# Altium PCB 主控板.PcbDoc
Units mil, origin at the board's own origin, x right, y up, seen from the top; angles counter-clockwise.
Board outline 3015 x 3325 mil, 2 copper layers (Top Layer, Bottom Layer); 40 components, 37 nets, 216 pads, 0 vias.
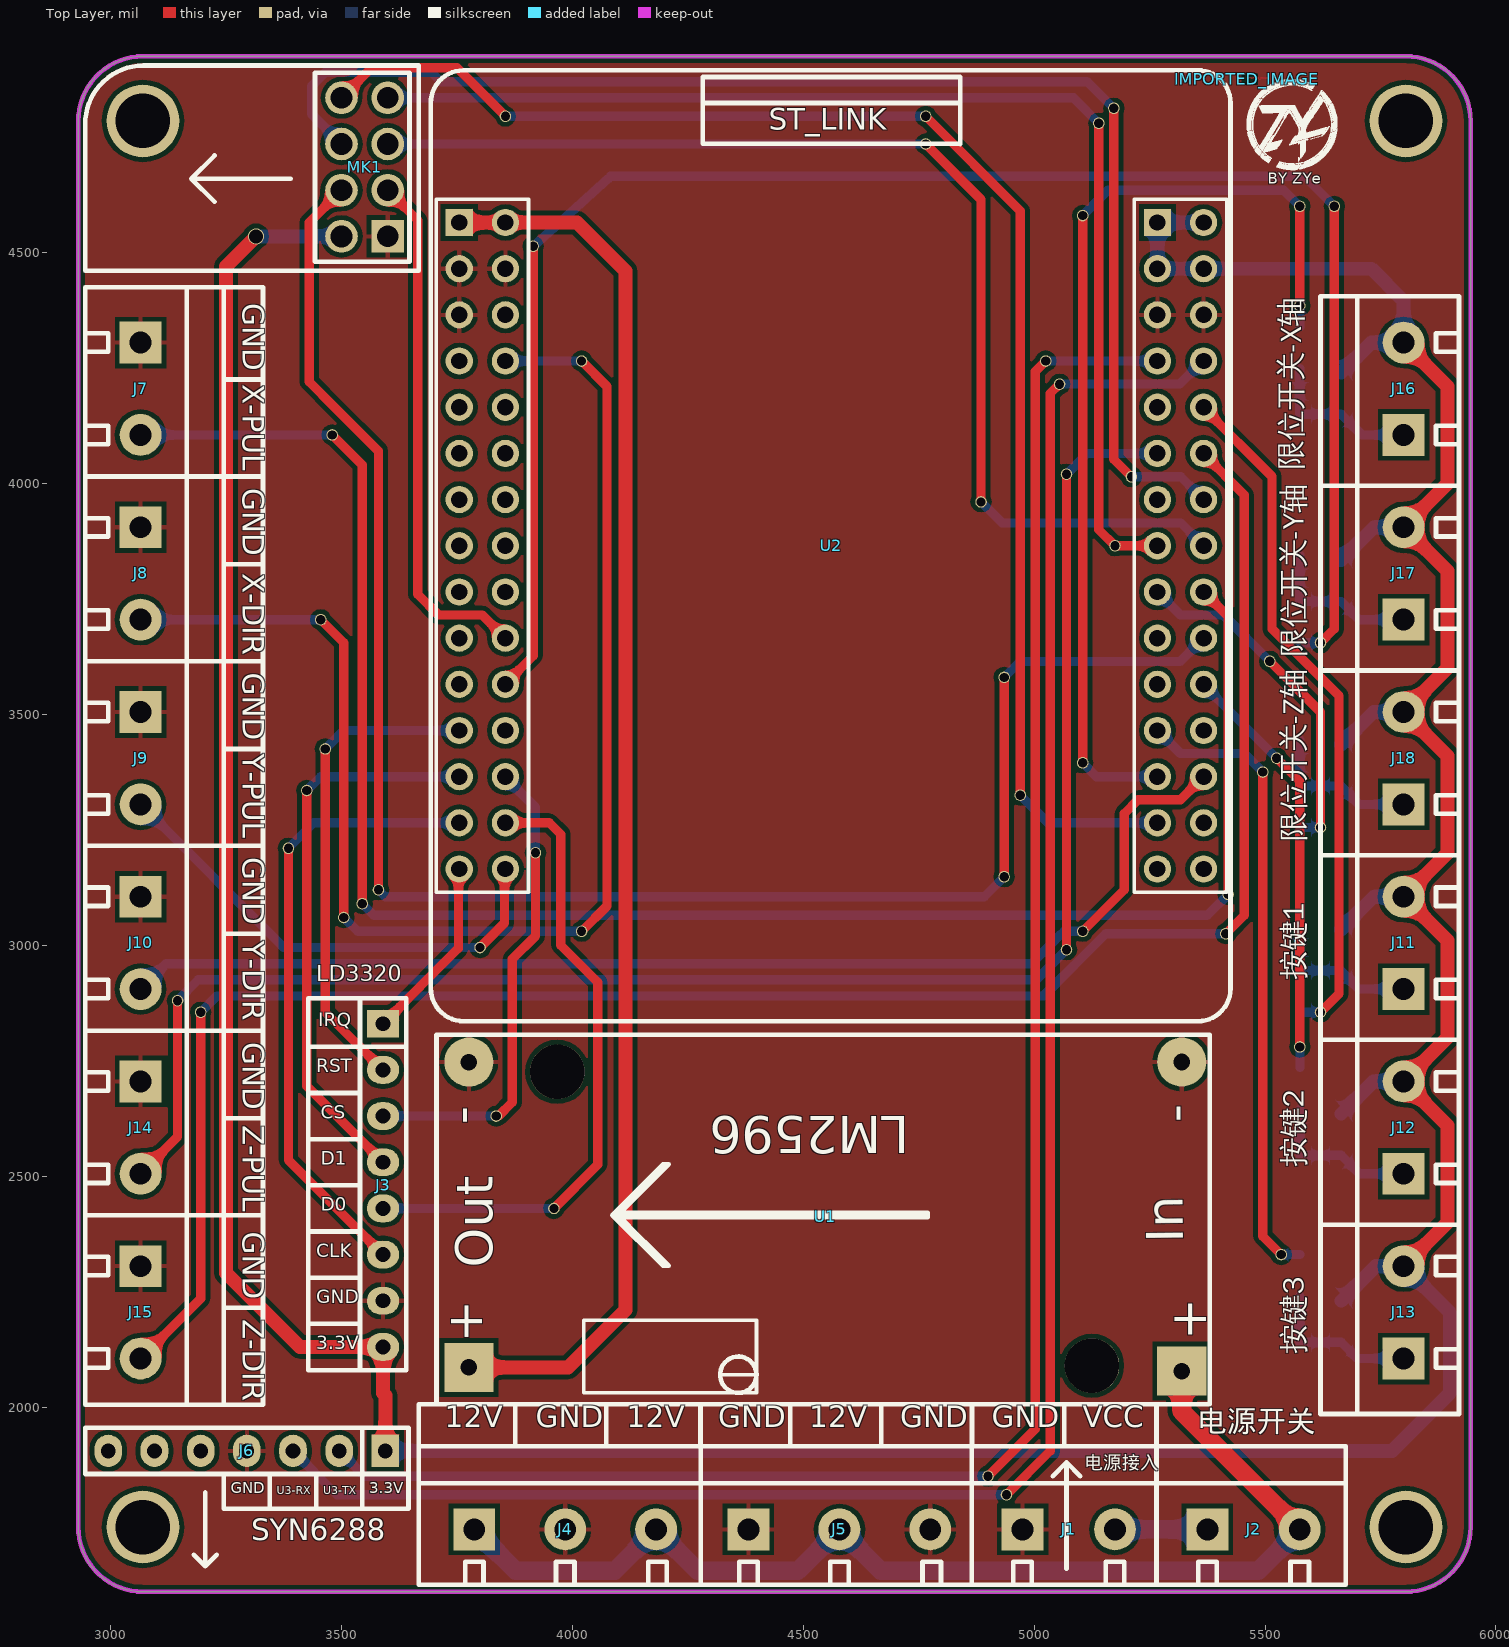
[diagram p0: Top Layer view]
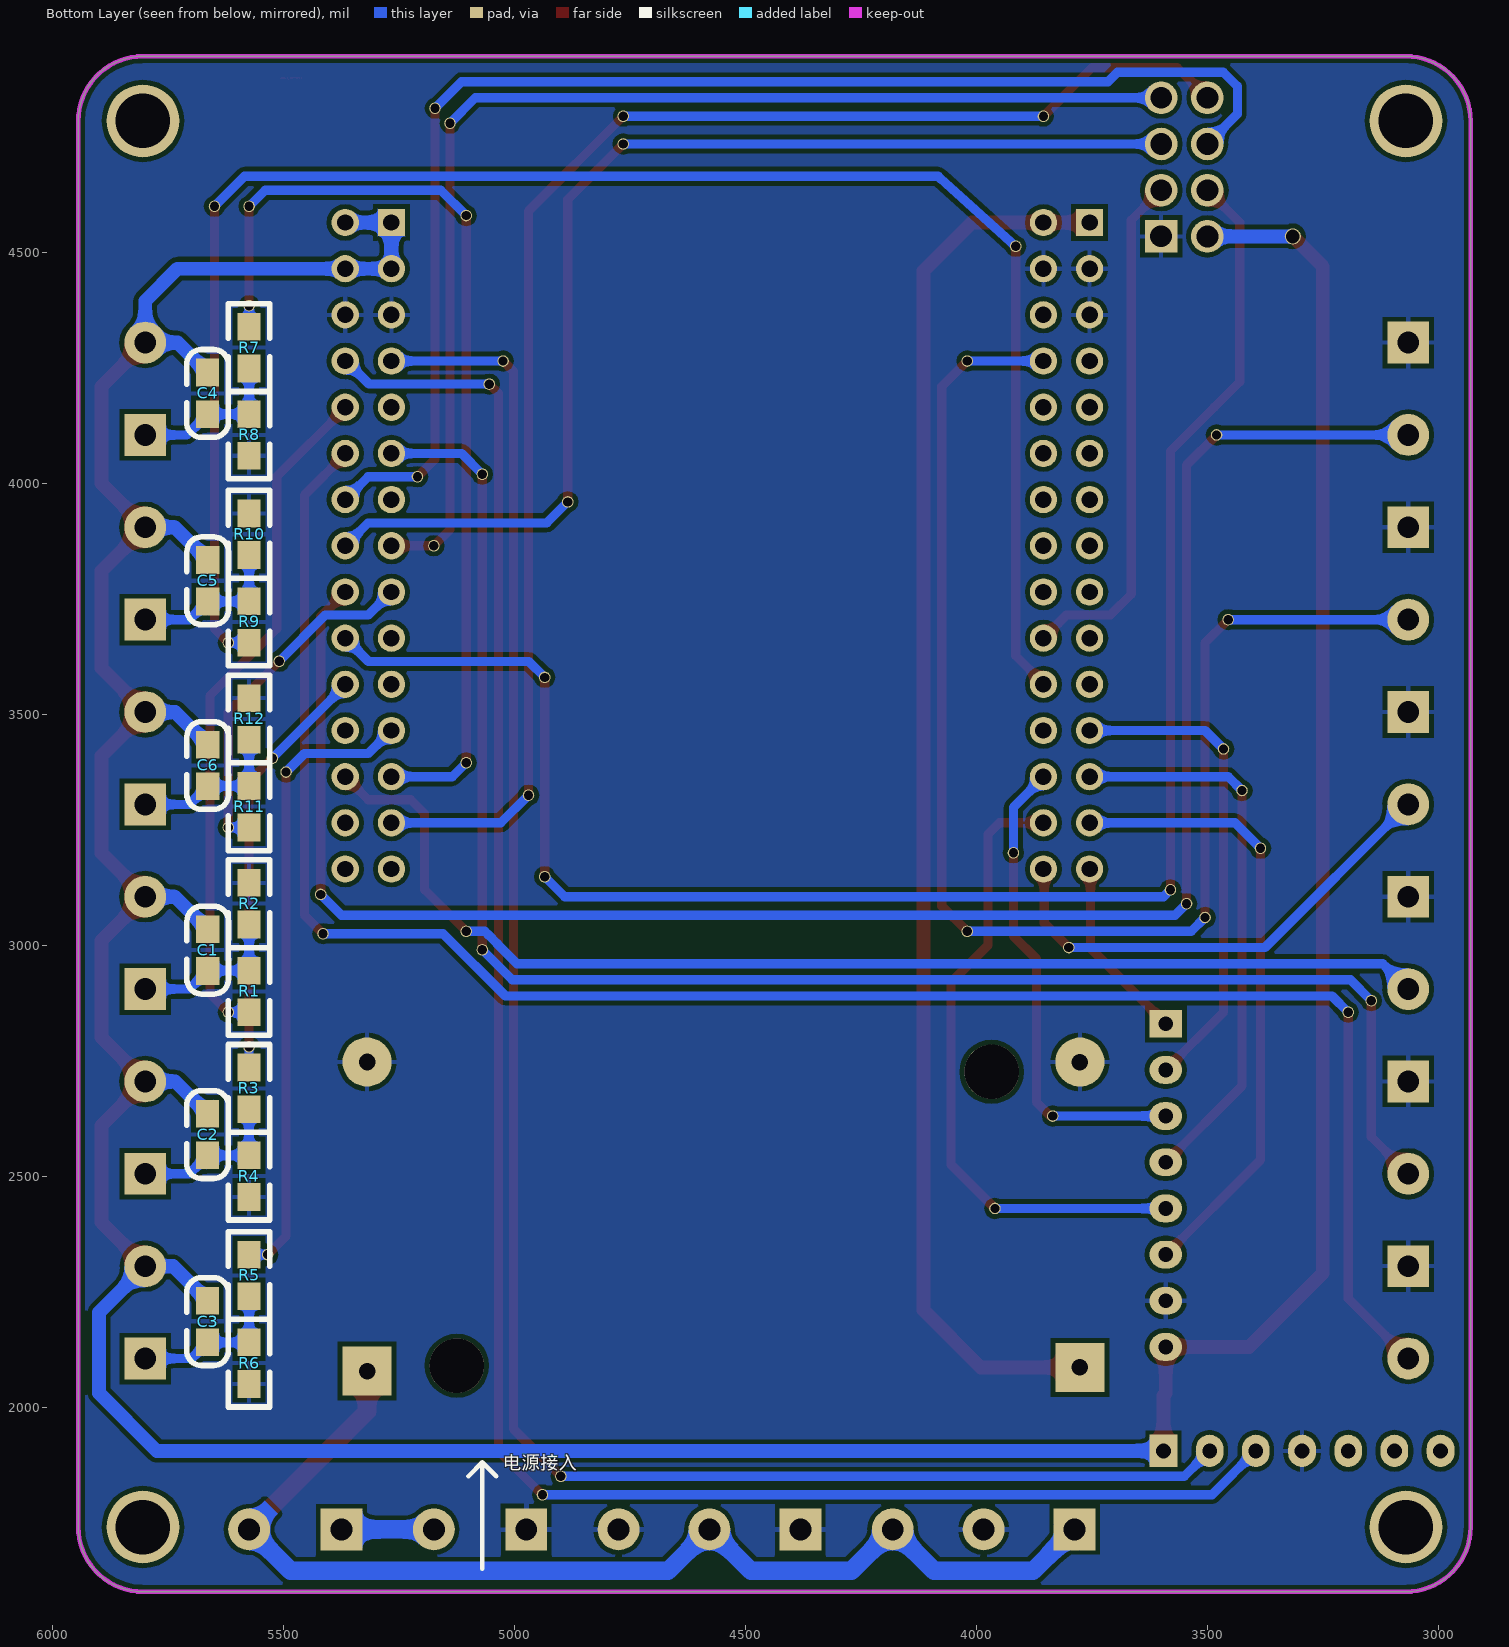
[diagram p1: Bottom Layer view, seen from below]

## Layer stack, top to bottom
Top Solder: solder mask 0.4, Solder Resist, Dk 3.5
Top Layer: signal copper 1.4
Dielectric 1: dielectric 12.6, FR-4, Dk 4.8
Bottom Layer: signal copper 1.4
Bottom Solder: solder mask 0.4, Solder Resist, Dk 3.5

## Board outline
2930,1740 2930,4785 cw(c3070,4785) 3070,4925 5805,4925 cw(c5805,4785) 5945,4785 5945,1740 cw(c5805,1740) 5805,1600 3070,1600 cw(c3070,1740)

## Design rules (kind name [scope] priority, off if disabled: settings)
Clearance [All] p1: gap=10 ignorepadtopadclearanceinfootprint=FALSE except(0: Arc-Hole Track-Hole SMDPad-Hole THPad-Hole Via-Hole Fill-Hole Poly-Hole Region-Hole Text-Hole)
PolygonConnect [All] p1: connectstyle=Relief reliefconductorwidth=10 reliefentries=4 polygonreliefangle="90 Angle" airgapwidth=10
RoutingVias [All] p1: holewidth=28 width=50 viastyle="Through Hole" minholewidth=28 minwidth=50 maxholewidth=150 maxwidth=200
SilkToSilkClearance [All] p1: silktosilkclearance=5
SilkToSolderMaskClearance [IsPad] p1: minsilkscreentomaskgap=0 clearancetoexposedcopper=TRUE
SolderMaskExpansion [All] p1: expansion=4
Width 12V [InNet('+12')] p1: maxlimit=100 minlimit=40 preferedwidth=40
Width 5V [InNet('+5')] p2: maxlimit=100 minlimit=30 preferedwidth=30
Width 3,3V [InNet('3.3V')] p3: maxlimit=100 minlimit=30 preferedwidth=30
Width GND [InNet('GND')] p4: maxlimit=100 minlimit=30 preferedwidth=30
Width [All] p5: maxlimit=100 minlimit=20 preferedwidth=20
28 further rules are at their usual default settings.

## Classes and differential pairs
component class 主控板: C1 C2 C3 C4 C5 C6 J1 J2 J3 J4 J5 J6 J7 J8 J9 J10 J11 J12 J13 J14 J15 J16 J17 J18 MK1 R1 R2 R4 R6 R7 R8 R9 R10 R11 R12 U1

## Components (designator, comment, footprint, x,y, rotation, side; value= is the part's Value field where it differs from the comment)
C1 "104" 0805C 5665,2945 r90 bottom
C2 "104" 0805C 5665.4,2545.71 r90 bottom
C3 "104" 0805C 5665.4,2140.71 r90 bottom
C4 "104" 0805C 5665.4,4150.71 r90 bottom
C5 "104" 0805C 5665,3745 r90 bottom
C6 "104" 0805C 5665,3345 r90 bottom
IMPORTED_IMAGE "Comment" IMPORTED_IMAGE 5460,4875 r0 top
J1 "12V电源" KF301-5.0-2P 4975,1735 r0 top
J2 "SWITCH" KF301-5.0-2P 5375,1735 r0 top
J3 "LD3320" Fe-HDR1X8/2.54-S 3590,2830 r0 top
J4 "KF301-3P" KF301-5.0-3P 3787.6,1735 r0 top
J5 "KF301-3P" KF301-5.0-3P 4381.3,1735 r0 top
J6 "SYN6288" Fe-HDR1X7/2.54-S 3595,1905 r270 top
J7 "KF301-2P" KF301-5.0-2P 3065,4305 r270 top
J8 "KF301-2P" KF301-5.0-2P 3065,3905 r270 top
J9 "KF301-2P" KF301-5.0-2P 3065,3505 r270 top
J10 "KF301-2P" KF301-5.0-2P 3065,3105 r270 top
J11 "按键1" KF301-5.0-2P 5800,2905 r90 top
J12 "按键2" KF301-5.0-2P 5800,2505 r90 top
J13 "按键3" KF301-5.0-2P 5800,2105 r90 top
J14 "KF301-2P" KF301-5.0-2P 3065,2705 r270 top
J15 "KF301-2P" KF301-5.0-2P 3065,2305 r270 top
J16 "限位开关_X轴" KF301-5.0-2P 5800,4105 r90 top
J17 "限位开关_Y轴" KF301-5.0-2P 5800,3705 r90 top
J18 "限位开关_Z轴" KF301-5.0-2P 5800,3305 r90 top
MK1 "NRF24L01" WIRELM-SMD_NRF24L01 3096.2,4755.8 r270 top
R1 "1K" 0805R 5575,2855 r90 bottom
R2 "4.7K" 0805R 5575,3135 r270 bottom
R3 "1K" 0805R 5575.4,2735 r270 bottom
R4 "4.7K" 0805R 5575.4,2455 r90 bottom
R5 "1K" 0805R 5575,2330 r270 bottom
R6 "4.7K" 0805R 5575,2050 r90 bottom
R7 "1K" 0805R 5575,4339 r270 bottom
R8 "4.7K" 0805R 5575,4060 r90 bottom
R9 "1K" 0805R 5575,3655 r90 bottom
R10 "4.7K" 0805R 5575,3935 r270 bottom
R11 "1K" 0805R 5575,3255 r90 bottom
R12 "4.7K" 0805R 5575,3535 r270 bottom
U1 "LM2596模块-29AH" LM2596 4552.3,2406.06 r180 top
U2 "STM32F103RCT6核心板" STM32F103RC 3755,3165 r0 top

## Footprints (in the part's own frame and the unit in brackets; to place one, negate y for a bottom-side part, rotate by r counter-clockwise, add the part's x,y. Pads: shape width x height; smd on the part's side, far side on the other; paste and mask are expansions set on the pad)
0805C [mil]
  rect 60x50 smd: 1(-0.71,-0.4) 2(89.29,-0.4)
  silkscreen extent -51,-45 139,45, body extent 6,-25 84,25, height 31
0805R [mil]
  rect 60x50 smd: 1(0,0) 2(90,0)
  silkscreen extent -50,-45 140,45, body extent 1,-25 80,25, height 15
Fe-HDR1X7/2.54-S [mil]
  rect 70x60 hole 32: 1(0,0)
  oval 70x60 hole 32: 2(0,-100) 3(0,-200) 4(0,-300) 5(0,-400) 6(0,-500) 7(0,-600)
  silkscreen extent -50,-650 50,50, body extent -49,-655 49,55, height 126
Fe-HDR1X8/2.54-S [mil]
  rect 70x60 hole 32: 1(0,0)
  oval 70x60 hole 32: 2(0,-100) 3(0,-200) 4(0,-300) 5(0,-400) 6(0,-500) 7(0,-600) 8(0,-700)
  silkscreen extent -50,-750 50,55, body extent -49,-755 49,55, height 126
IMPORTED_IMAGE [mil]
  silkscreen extent 0,-196 197,0
KF301-5.0-2P [mm] "可拼接端子/6A"
  rect 2.3x2.3 hole 1.2: 1(0,0)
  round 2.3 hole 1.2: 2(5.08,0)
  silkscreen extent -3.05,-3.05 7.62,4.57, body extent -3,-3.09 7.5,4.51, height 10.05
KF301-5.0-3P [mm] "可拼接端子/6A"
  rect 2.3x2.3 hole 1.2: 1(0,0)
  round 2.3 hole 1.2: 2(5,0) 3(10,0)
  silkscreen extent -3.05,-3.05 12.7,4.57, body extent -3,-3.09 12.5,4.51, height 10.05
LM2596 [mm]
  rect 2.7x2.7 hole 0.91: 1(-19.487,8.338) 3(19.719,8.137)
  round 2.7 hole 0.91: 2(-19.489,-8.663) 4(19.721,-8.66)
  round 3 hole 3 unplated: ""(-14.549,8.043) ""(14.862,-8.119)
  silkscreen extent -21.03,-10.16 21.51,10.16
STM32F103RC [mm]
  rect 1.5x1.5 hole 0.9: 1(0,35.56) 31(38.401,35.56)
  round 1.5 hole 0.9: 2(2.54,35.56) 3(0,33.02) 4(2.54,33.02) 5(0,30.48) 6(2.54,30.48) 7(0,27.94) 8(2.54,27.94) 9(0,25.4) 10(2.54,25.4) 11(0,22.86) 12(2.54,22.86) 13(0,20.32) 14(2.54,20.32) 15(0,17.78) 16(2.54,17.78) 17(0,15.24) 18(2.54,15.24) 19(0,12.7) 20(2.54,12.7) 21(0,10.16) 22(2.54,10.16) 23(0,7.62) 24(2.54,7.62) 25(0,5.08) 26(2.54,5.08) 27(0,2.54) 28(2.54,2.54) 29(0,0) 30(2.54,0) 32(40.941,35.56) 33(38.401,33.02) 34(40.941,33.02) 35(38.401,30.48) 36(40.941,30.48) 37(38.401,27.94) 38(40.941,27.94) 39(38.401,25.4) 40(40.941,25.4) 41(38.401,22.86) 42(40.941,22.86) 43(38.401,20.32) 44(40.941,20.32) 45(38.401,17.78) 46(40.941,17.78) 47(38.401,15.24) 48(40.941,15.24) 49(38.401,12.7) 50(40.941,12.7) 51(38.401,10.16) 52(40.941,10.16) 53(38.401,7.62) 54(40.941,7.62) 55(38.401,5.08) 56(40.941,5.08) 57(38.401,2.54) 58(40.941,2.54) 59(38.401,0) 60(40.941,0)
  silkscreen extent -1.27,-1.27 42.21,43.56
WIRELM-SMD_NRF24L01 [mm]
  rect 1.8x1.8 hole 1.2: 1(5.606,12.799)
  round 1.8 hole 1.2: 2(5.608,10.256) 3(3.068,12.796) 4(3.068,10.256) 5(0.528,12.796) 6(0.528,10.256) 7(-2.012,12.796) 8(-2.012,10.256)
  silkscreen extent -3.79,-3.84 7.5,14.5

## Part data
C1 C2 C3 C4 C5 C6: library part CAP, "无极性电容"
J1 J2 J11 J12 J13 J16 J17 J18: library part KF301-2P
J3: library part "Female HDR1X8"
J6: library part "Female HDR1X7"
R1 R2 R3 R4 R5 R6 R7 R8 R9 R10 R11 R12: library part RES

## Free pads (board coordinates)
  round 157.48 hole 118.11: 4(3070,4785) 4(3070,1740) 4(5805,4785) 4(5805,1740)
  round 25 hole 20: 5(3145,2880) 5(3195,2855) 5(3385,3210) 5(3425,3335) 5(3455,3705) 5(3465,3425) 5(3480,4105) 5(3500,4735) 5(3500,4835) 5(3505,3060) 5(3545,3090) 5(3580,3120) 5(3800,2995) 5(3835,2630) 5(3855,4795) 5(3915,4513.5) 5(3920,3200) 5(3960,2430) 5(4020,3030) 5(4020,4265) 5(4765,4735) 5(4765,4795) 5(4885,3960) 5(4900,1850) 5(4935,3148.33) 5(4935,3580) 5(4940,1810) 5(4970,3325) 5(5025,4265) 5(5055,4215) 5(5070,2990) 5(5070,4020) 5(5105,3030) 5(5105,3395) 5(5105,4580) 5(5140,4780) 5(5172.5,4812.5) 5(5175,3865) 5(5210.47,4014.53) 5(5415,3025) 5(5420,3110) 5(5495,3375) 5(5510,3615) 5(5525,3405) 5(5535,2330) 5(5575,4385) 5(5575,4600) 5(5575.2,2779.8) 5(5620,2855) 5(5620,3255) 5(5620,3655) 5(5650,4600)
  round 35 hole 30: 5(3315,4535)

## Nets (pads, with @x,y where several pads share a name; then routed paths per layer and width w, separated by ;. In a path a pad name is that pad's centre, name@x,y a point inside that pad or via, vN(x,y) a via of type N, cw(c..) or ccw(c..) an arc to the next point about the centre after c; other vN are vias at no path point)
3.3V: C1.2 C2.2 C3.2 C4.2 C5.2 C6.2 J3.8 J6.1 J11.2 J12.2 J13.2 J16.2 J17.2 J18.2 MK1.2 pad.5@3315,4535 U2.31 U2.32 U2.33 U2.34 | length 9995.1
  Top Layer w30: pad.5@3315,4535 3250,4470 3250,2290 3410,2130 J3.8 3590,2030 3595,2025 J6.1 ; J13.2 5895,2400 5895,2610 J12.2 5895,2800 5895,3010 J11.2 5895,3200 5895,3410 J18.2 5895,3600 5895,3810 J17.2 5895,4000 5895,4210 J16.2
  Bottom Layer w30: pad.5@3315,4535 MK1.2 ; J6.1 5775,1905 5900,2030 5900,2205 J13.2 5740,2305 C3.2 ; U2.32 U2.31 U2.33 U2.34 5730,4465 5800,4395 J16.2 5730,4305 C4.2 ; C1.2 5735.3,3105 J11.2 ; C6.2 5735.3,3505 J18.2 ; C5.2 5735.3,3905 J17.2 ; C2.2 5735,2705 J12.2
+5: U1.3 U2.1 U2.2 | length 3044
  Top Layer w30: U2.1 U2.2 4010,4565 4115,4460 4115,2210 3990.7,2085.7 U1.3
+12: J2.2 J4.1 J4.3 J5.2 U1.1 | length 2459.7
  Top Layer w40: U1.1 5319.49,1990.51 J2.2
  Bottom Layer w40: J4.1 3877.6,1645 4091.3,1645 J4.3 4271.3,1645 4488.15,1645 J5.2 4668.15,1645 5485,1645 J2.2
GND: J1.1 J3.7 J4.2 J5.1 J5.3 J6.4 J7.1 J8.1 J9.1 J10.1 J14.1 J15.1 MK1.1 R2.1 R4.1 R6.1 R8.1 R10.1 R12.1 U1.2 U1.4 U2.3 U2.4 U2.5 U2.35 U2.36
Key1: pad.5@5620,2855 R1.1 U2.40 | length 1493.8
  Top Layer w20: U2.40@5365,4165 5515,4015 5515,3685 5660,3540 5660,2895 pad.5@5620,2855
  Bottom Layer w20: R1.1 pad.5@5620,2855
Key2: pad.5@5525,3405 pad.5@5575.2,2779.8 R3.1 U2.52 | length 917.1
  Top Layer w20: pad.5@5525,3405 5575.2,3354.8 pad.5@5575.2,2779.8
  Bottom Layer w20: U2.52@5365,3565 pad.5@5525,3405 ; pad.5@5575.2,2779.8 5575.4,2774.6 R3.1
Key3: pad.5@5495,3375 pad.5@5535,2330 R5.1 U2.53 | length 1367
  Top Layer w20: pad.5@5495,3375 5495,2370 pad.5@5535,2330
  Bottom Layer w20: U2.53 5316.87,3415 5455,3415 pad.5@5495,3375 ; pad.5@5535,2330 R5.1
LD3320_CLK: J3.6 pad.5@3385,3210 U2.27 | length 1357.7
  Top Layer w20: pad.5@3385,3210 3385,3145 3385,2535 J3.6
  Bottom Layer w20: pad.5@3385,3210 3440,3265 U2.27
LD3320_CS: J3.3 pad.5@3835,2630 pad.5@3920,3200 U2.26 | length 1045.8
  Top Layer w20: pad.5@3835,2630 3840,2630 3870,2660 3870,2970 3920,3020 pad.5@3920,3200
  Bottom Layer w20: J3.3 pad.5@3835,2630 ; U2.26@3853.13,3365 3920,3298.13 pad.5@3920,3200
LD3320_D0: J3.5 pad.5@3960,2430 U2.28 | length 1384.7
  Top Layer w20: U2.28@3853.13,3265 U2.28 3950,3265 3975,3240 3975,3000 4055,2920 4055,2525 pad.5@3960,2430
  Bottom Layer w20: J3.5 pad.5@3960,2430
LD3320_D1: J3.4 pad.5@3425,3335 U2.25 | length 1215.8
  Top Layer w20: pad.5@3425,3335 3425,2695 J3.4
  Bottom Layer w20: pad.5@3425,3335 3455,3365 U2.25
LD3320_IRQ: J3.1 U2.29 | length 402.6
  Top Layer w20: J3.1 3753.13,2993.13 U2.29@3753.13,3165
LD3320_RST: J3.2 pad.5@3465,3425 U2.23 | length 1048.3
  Top Layer w20: pad.5@3465,3420 3465,2855 J3.2
  Bottom Layer w20: pad.5@3465,3425 3505,3465 U2.23
NetC1_1: C1.1 J11.1 R1.2 R2.2 | length 341.6
  Bottom Layer w20: R2.2 R1.2 5663.89,2945 C1.1 5703.89,2905 J11.1
NetC2_1: C2.1 J12.1 R3.2 R4.2 | length 341.2
  Bottom Layer w20: R3.2 R4.2 C2.1 5705,2505 J12.1
NetC3_1: C3.1 J13.1 R5.2 R6.2 | length 339.5
  Bottom Layer w20: R5.2 R6.2 C3.1 5700,2105 J13.1
NetC4_1: C4.1 J16.1 R7.2 R8.2 | length 342.6
  Bottom Layer w20: R7.2 R8.2 C4.1 5710,4105 J16.1
NetC5_1: C5.1 J17.1 R9.2 R10.2 | length 341.6
  Bottom Layer w20: R10.2 R9.2 5575.71,3744.29 C5.1 5703.89,3705 J17.1
NetC6_1: C6.1 J18.1 R11.2 R12.2 | length 341.6
  Bottom Layer w20: R12.2 R11.2 5663.89,3345 C6.1 5703.89,3305 J18.1
NetJ1_2: J1.2 J2.1 | length 200
  Bottom Layer w40: J1.2 J2.1
NRF_CE: MK1.3 U2.20 | length 1131.3
  Top Layer w20: MK1.3 3665,4570 3665,3760 3710,3715 3805,3715 U2.20
NRF_CSN: MK1.4 pad.5@3580,3120 pad.5@4935,3148.33 pad.5@4935,3580 U2.50 | length 3884
  Top Layer w20: MK1.4 3430,4565 3430,4220 3485,4165 3580,4070 pad.5@3580,3120 ; pad.5@4935,3148.33 pad.5@4935,3580
  Bottom Layer w20: pad.5@3580,3120 3595,3105 4891.67,3105 pad.5@4935,3148.33 ; pad.5@4935,3580 4969.53,3614.53 5316.39,3614.53 U2.50
NRF_IRQ: MK1.8 pad.5@3500,4835 pad.5@3855,4795 pad.5@4765,4795 pad.5@4970,3325 U2.57 | length 3212
  Top Layer w20: MK1.8 3565,4900 3750,4900 pad.5@3855,4795 ; pad.5@4765,4795 4970,4590 pad.5@4970,3325
  Bottom Layer w20: pad.5@3855,4795 pad.5@4765,4795 ; pad.5@4970,3325 5030,3265 U2.57
NRF_MISO: MK1.7 pad.5@5140,4780 pad.5@5175,3865 U2.45 | length 2582.3
  Top Layer w20: pad.5@5140,4780 5140,3900 5175,3865 U2.45@5265,3865
  Bottom Layer w20: MK1.7 5085,4835 pad.5@5140,4780
NRF_MOSI: MK1.6 pad.5@3500,4735 pad.5@5172.5,4812.5 pad.5@5210.47,4014.53 U2.44 | length 2924.9
  Top Layer w20: pad.5@5172.5,4812.5 5172.5,4052.5 pad.5@5210.47,4014.53
  Bottom Layer w20: MK1.6 3435,4800 3435,4860 3465.43,4890.43 3694.57,4890.43 3715,4870 5115,4870 pad.5@5172.5,4812.5 ; pad.5@5210.47,4014.53 5317.34,4014.53 U2.44
NRF_SCK: MK1.5 pad.5@4765,4735 pad.5@4885,3960 U2.46 | length 2510.9
  Top Layer w20: pad.5@4765,4735 4885,4615 pad.5@4885,3960
  Bottom Layer w20: MK1.5 pad.5@4765,4735 ; pad.5@4885,3960 4930.47,3914.53 5317.34,3914.53 U2.46
Switch1: pad.5@5105,3395 pad.5@5105,4580 pad.5@5575,4385 pad.5@5575,4600 R7.1 U2.55 | length 2127.6
  Top Layer w20: pad.5@5105,3395 pad.5@5105,4580 ; pad.5@5575,4385 pad.5@5575,4600
  Bottom Layer w20: pad.5@5105,3395 5135,3365 U2.55 ; pad.5@5105,4580 5160,4635 5540,4635 pad.5@5575,4600 ; R7.1 pad.5@5575,4385
Switch2: pad.5@3915,4513.5 pad.5@5620,3655 pad.5@5650,4600 R9.1 U2.22 | length 3796.8
  Top Layer w20: U2.22@3853.13,3565 3915,3626.87 pad.5@3915,4513.5 ; pad.5@5620,3655 5650,3685 pad.5@5650,4600
  Bottom Layer w20: pad.5@3915,4513.5 4077.78,4660 4082.78,4665 5585,4665 pad.5@5650,4600 ; R9.1 pad.5@5620,3655
Switch3: pad.5@5510,3615 pad.5@5620,3255 R11.1 U2.47 | length 756.8
  Top Layer w20: U2.47@5265,3765 U2.47@5265.94,3765 ; pad.5@5510,3615 5620,3505 pad.5@5620,3255
  Bottom Layer w20: U2.47 5316.87,3715 5410,3715 pad.5@5510,3615 ; R11.1 pad.5@5620,3255
SYN6288_RX: J6.3 pad.5@4940,1810 pad.5@5055,4215 U2.38 | length 4367.7
  Top Layer w20: pad.5@4940,1810 5035,1905 5035,4195 5055,4215 pad.5@5055.47,4215.47
  Bottom Layer w20: J6.3 3490,1810 pad.5@4940,1810 ; pad.5@5055.47,4215.47 5315.47,4215.47 U2.38@5365,4265
SYN6288_TX: J6.2 pad.5@4900,1850 pad.5@5025,4265 U2.37 | length 4136.4
  Top Layer w20: pad.5@4900,1850 5002.5,1952.5 5002.5,4219.22 5002.5,4242.5 pad.5@5025,4265
  Bottom Layer w20: J6.2 3550,1850 pad.5@4900,1850 ; pad.5@5025,4265 U2.37
X_DIR: J8.2 pad.5@3455,3705 pad.5@3505,3060 pad.5@4020,3030 pad.5@4020,4265 U2.8 | length 3030.6
  Top Layer w20: pad.5@3455,3705 3505,3655 pad.5@3505,3060 ; U2.8@3853.13,4265 U2.8 ; pad.5@4020,3030 4075,3085 4075,4210 pad.5@4020,4265
  Bottom Layer w20: J8.2 pad.5@3455,3705 ; pad.5@3505,3060 3535,3030 pad.5@4020,3030 ; U2.8 pad.5@4020,4265
X_PUL: J7.2 pad.5@3480,4105 pad.5@3545,3090 pad.5@5420,3110 U2.48 | length 4037.9
  Top Layer w20: pad.5@3480,4105 3545,4040 pad.5@3545,3090 ; U2.48 5420,3711.87 pad.5@5420,3110
  Bottom Layer w20: J7.2 pad.5@3480,4105 ; pad.5@3545,3090 3570,3065 5375,3065 pad.5@5420,3110
Y_DIR: J10.2 pad.5@5105,3030 U2.56 | length 2589.6
  Top Layer w20: pad.5@5105,3030 5195,3120 5195,3285 5225,3315 5316.87,3315 U2.56
  Bottom Layer w20: J10.2 3120,2960 4995,2960 5037.5,3002.5 5037.5,3003.46 5056.54,3022.5 5057.5,3022.5 5065,3030 pad.5@5105,3030
Y_PUL: J9.2 pad.5@3800,2995 U2.30 | length 1055.4
  Top Layer w20: pad.5@3800,2995 3853.13,3048.13 U2.30@3853.13,3165
  Bottom Layer w20: J9.2 3375,2995 pad.5@3800,2995
Z_DIR: J15.2 pad.5@3195,2855 pad.5@5415,3025 U2.42 | length 4187.3
  Top Layer w20: J15.2 3195,2235 pad.5@3195,2855 ; U2.42 5366.87,4063.13 5455,3975 5455,3065 pad.5@5415,3025
  Bottom Layer w20: pad.5@3195,2855 3230,2890 5020,2890 5155,3025 pad.5@5415,3025
Z_PUL: J14.2 pad.5@3145,2880 pad.5@5070,2990 pad.5@5070,4020 U2.41 | length 3622.3
  Top Layer w20: J14.2 3145,2585 pad.5@3145,2880 ; pad.5@5070,2990 pad.5@5070,4020
  Bottom Layer w20: pad.5@3145,2880 3190,2925 5005,2925 pad.5@5070,2990 ; pad.5@5070,4020 5115,4065 U2.41@5265,4065
pads on no net: J6.5 J6.6 J6.7 U1. U2.6 U2.7 U2.9 U2.10 U2.11 U2.12 U2.13 U2.14 U2.15 U2.16 U2.17 U2.18 U2.19 U2.21 U2.24 U2.39 U2.43 U2.49 U2.51 U2.54 U2.58 U2.59 U2.60

## Polygon pours and split planes (outlines as drawn)
GND on Bottom Layer "Bottom Layer-GND" (solid, remove dead copper, pour order 22): 2400,5430 2400,1605 2890,1115 2930,1155 6205,1155 6205,5415 6635,5845
GND on Top Layer "Top Layer-GND" (solid, remove dead copper, pour order 20): 2000,5505 2530,4975 2530,795 5900,795 6785,1680 6785,6200

## Keep-outs
Keep-Out Layer:
  the board outline again, w10

## Silkscreen, mask and mechanical layers (free items; w line width, h text height)
Top Overlay:
  lines w10: 2945,4777.18 cw(c3071.61,4778.39) 3070.4,4905 ; 3180,1680 3205,1655 ; 3205,1815 3205,1655 ; 3225,4610 3175,4660 ; 3225,4710 3175,4660 ; 3230,1680 3205,1655 ; 3245,1855 3245,1780 3345,1780 ; 3245,2005 3330,2005 3330,4425 3245,4425 ; 3245,2215 3325,2215 ; 3245,2415 3330,2415 ; 3245,2625 3325,2625 ; 3245,2815 3330,2815 ; 3245,3025 3325,3025 ; 3245,3215 3330,3215 ; 3245,3425 3325,3425 ; 3245,3615 3325,3615 ; 3245,3825 3325,3825 ; 3245,4015 3325,4015 ; 3245,4225 3325,4225 ; 3345,1855 3345,1780 ; 3390,4660 3175,4660 ; 3428.36,2180 3540,2180 ; 3428.36,2280 3540,2280 ; 3428.36,2380.01 3540,2380.01 ; 3428.36,2480.01 3540,2480.01 ; 3428.36,2580.01 3540,2580.01 ; 3428.36,2680.02 3540,2680.02 ; 3428.36,2780.02 3540,2780.02 ; 3445,1855 3445,1780 ; 3540,2080 3428.36,2080 3428.36,2885 3540,2885 ; 3545,1855 3545,1780 ; 3645,1855 3645,1780 3545,1780 ; 3667.6,1915 3667.6,2006.06 3724.48,2006.06 ; 3693.35,2907.08 3693.35,4823.87 cw(c3763.85,4824.08) 3763.64,4894.58 5354.5,4894.58 cw(c5354.5,4823.87) 5425.21,4823.87 5425.21,2906.13 cw(c5354.5,2906.13) 5354.5,2835.42 3765,2835.42 ; 3693.35,2907.29 ccw(c3765,2907.08) 3764.79,2835.42 ; 3876.57,1915 3876.57,2002.13 ; 4073.43,1915 4073.43,2002.13 ; 4277.32,1915 4277.32,2002.13 ; 4471.57,1915 4471.57,2002.13 ; 4668.43,1915 4668.43,2002.13 ; 4865.28,1915 4865.28,2002.13 ; 5040,1850 5070,1880 ; 5065,1915 5065,2002.13 ; 5070,1650 5070,1880 ; 5100,1850 5070,1880 ; 5265,1915 5265,2006.06 ; 3345,1780 3445,1780 ; 3445,1780 3545,1780
  text "BY ZYe" at 5506.06,4640 h40
  text "GND" at 3270,4390 h80 r270
  text "X-PUL" at 3270,4215 h80 r270
  text "限位开关-X轴" at 5595,4030 h80 r90
  text "GND" at 3270,3990 h80 r270
  text "X-DIR" at 3270,3805 h80 r270
  text "限位开关-Y轴" at 5600,3625 h80 r90
  text "GND" at 3270,3590 h80 r270
  text "Y-PUL" at 3270,3415 h80 r270
  text "限位开关-Z轴" at 5600,3225 h80 r90
  text "GND" at 3270,3190 h80 r270
  text "Y-DIR" at 3270,3010 h80 r270
  text "按键1" at 5600,2925 h80 r90
  text "LD3320" at 3445,2910 h60
  text "IRQ" at 3450,2815 h50
  text "GND" at 3270,2790 h80 r270
  text "RST" at 3445,2715 h50
  text "CS" at 3455,2615.02 h50
  text "Z-PUL" at 3270,2610 h80 r270
  text "按键2" at 5600,2520 h80 r90
  text "D1" at 3455,2515.01 h50
  text "D0" at 3455,2415.01 h50
  text "GND" at 3270,2380 h80 r270
  text "CLK" at 3445,2315 h50
  text "GND" at 3445,2215 h50
  text "Z-DIR" at 3270,2190 h80 r270
  text "3.3V" at 3445,2115 h50
  text "按键3" at 5600,2115 h80 r90
  text "12V" at 3723.33,1940 h80
  text "GND" at 3920.71,1940 h80
  text "12V" at 4118.09,1940 h80
  text "GND" at 4315.47,1940 h80
  text "12V" at 4512.86,1940 h80
  text "GND" at 4710.24,1940 h80
  text "GND" at 4907.62,1940 h80
  text "VCC" at 5105,1940 h80
  text "电源开关" at 5354.5,1930 h80
  text "电源接入" at 5110,1855 h50
  text "GND" at 3260,1805 h40
  text "U3-RX" at 3360,1805 h30
  text "U3-TX" at 3460,1805 h30
  text "3.3V" at 3560,1805 h40
  text "SYN6288" at 3305,1695 h80
Bottom Overlay:
  lines w10: 5040,1850 5070,1880 ; 5070,1650 5070,1880 ; 5100,1850 5070,1880
  text "电源接入" at 5025,1855 h50
Mechanical 1:
  the board outline again, w10

## Text inside footprints (layer, text, board x,y; h text height)
U1: Top Overlay "LM2596" at 4729.9,2629.72 h80 r180; Top Overlay "Out" at 3827.3,2301.06 h80 r90; Top Overlay "In" at 5322.3,2356.06 h80 r90.62; Top Overlay "-" at 3737.3,2651.06 h80 r270; Top Overlay "-" at 5282.3,2656.06 h80 r270; Top Overlay "+" at 5292.3,2156.06 h80; Top Overlay "+" at 3737.3,2231.06 h80 r270
U2: Top Overlay "ST_LINK" at 4425,4750 h80